# EAGLE board MotorControlRev4-PrototypeA (EAGLE 7.7.0)
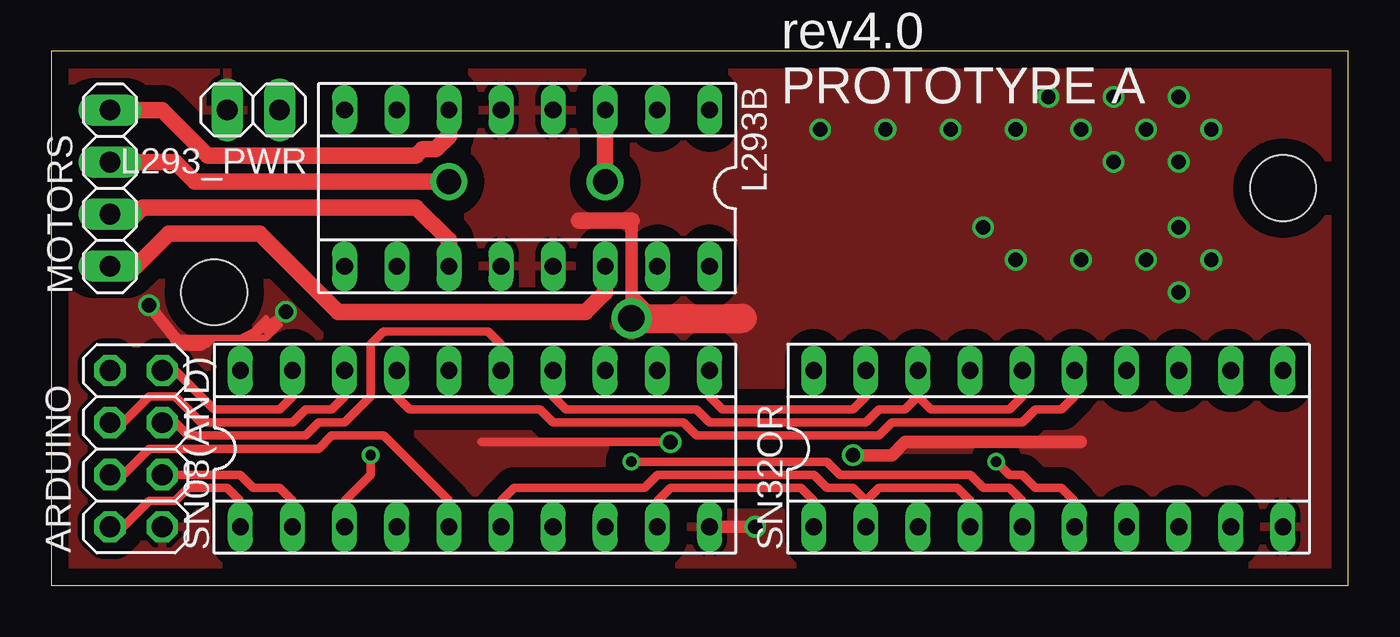
[diagram p0: board, top side]
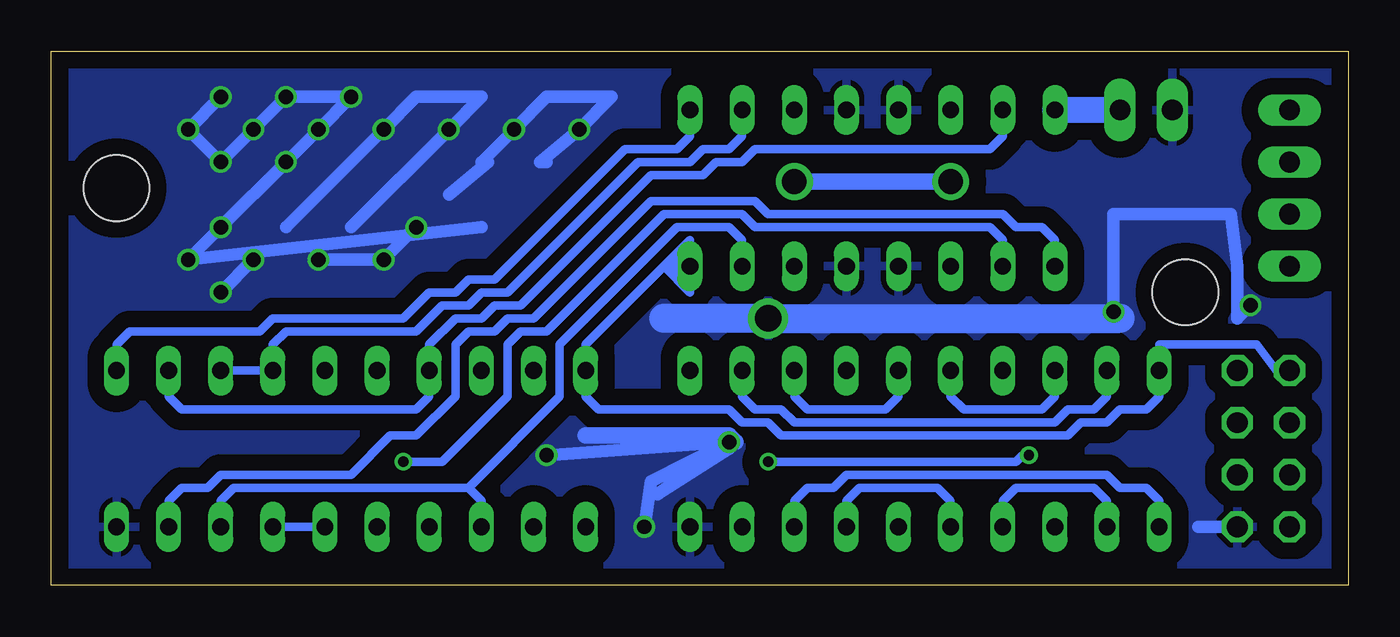
[diagram p1: board, bottom side, seen from below]

Size 63.18 x 26.04 mm. Coordinates in mm from the lower left corner, seen from the top.
Outline: 0,0 63.18,0 63.18,26.04 0,26.04 0,0
Copper layers (1*16): Top 0.0356mm / dielectric 1.5011mm / Bottom 0.0356mm
Design rules "oshpark-2layer": minimum track width 6mil, minimum drill 13mil, track to track 6mil, track to pad 6mil, pad to pad 6mil, via to via 6mil, smd to smd 6mil, copper to edge 15mil, drill to drill 6mil, minimum pad ring 7mil, minimum via ring 7mil, stop-mask expansion 2.5mil, vias tented up to drill 0mil, thermal gap 10mil
Holes 3.2 mm at 60.01,19.37 7.94,14.29

## Footprints (pad centres in the part's own frame; a part is rotated, then mirrored left to right if it is on the bottom)
2X04 = drill 1.016 octagon: 1 -3.81,-1.27; 2 -3.81,1.27; 3 -1.27,-1.27; 4 -1.27,1.27; 5 1.27,-1.27; 6 1.27,1.27; 7 3.81,-1.27; 8 3.81,1.27
1X02 = drill 1.016 long: 1 -1.27,0; 2 1.27,0
SOCKET-16 = drill 0.813 long: 1 -8.89,-3.81; 2 -6.35,-3.81; 3 -3.81,-3.81; 4 -1.27,-3.81; 5 1.27,-3.81; 6 3.81,-3.81; 7 6.35,-3.81; 8 8.89,-3.81; 9 8.89,3.81; 10 6.35,3.81; 11 3.81,3.81; 12 1.27,3.81; 13 -1.27,3.81; 14 -3.81,3.81; 15 -6.35,3.81; 16 -8.89,3.81
1X04 = drill 1.016 long: 1 -3.81,0; 2 -1.27,0; 3 1.27,0; 4 3.81,0
SOCKET-20 = drill 0.813 long: 1 -11.43,-3.81; 2 -8.89,-3.81; 3 -6.35,-3.81; 4 -3.81,-3.81; 5 -1.27,-3.81; 6 1.27,-3.81; 7 3.81,-3.81; 8 6.35,-3.81; 9 8.89,-3.81; 10 11.43,-3.81; 11 11.43,3.81; 12 8.89,3.81; 13 6.35,3.81; 14 3.81,3.81; 15 1.27,3.81; 16 -1.27,3.81; 17 -3.81,3.81; 18 -6.35,3.81; 19 -8.89,3.81; 20 -11.43,3.81

## Placement (x,y rotation side)
ARDUINO  [2X04]  4.13,6.67 90 top
L293_PWR  [1X02]  9.84,23.18 180 top
L293B  [SOCKET-16]  23.18,19.37 180 top
MOTORS  [1X04]  2.86,19.37 90 top
SN08(AND)  [SOCKET-20]  20.64,6.67 0 top
SN32OR  [SOCKET-20]  48.58,6.67 0 top

## Library data of the parts
ARDUINO L293_PWR MOTORS = pinhead
L293B SN08(AND) SN32OR = ic-package

## Nets
GND: ARDUINO.1 L293_PWR.2 L293B.4 L293B.5 L293B.12 L293B.13 SN08(AND).10 SN32OR.10
S$1: ARDUINO.7 SN08(AND).12 SN08(AND).19
S$2: SN08(AND).14 SN32OR.16 SN32OR.18
S$3: ARDUINO.6 SN08(AND).16 SN08(AND).18
S$4: SN08(AND).6 SN32OR.2 SN32OR.4
S$5: ARDUINO.5 SN08(AND).13 SN08(AND).15
S$6: SN08(AND).3 SN32OR.5
S$7: ARDUINO.3 SN08(AND).2 SN08(AND).4
S$8: SN08(AND).11 SN32OR.19
S$9: ARDUINO.4 SN08(AND).5 SN08(AND).7
S$10: SN08(AND).17 SN32OR.15
S$11: ARDUINO.2 SN08(AND).1 SN08(AND).8
S$12: L293B.10 SN32OR.6 SN32OR.7
S$13: ARDUINO.8 L293B.16 SN08(AND).20 SN32OR.20
S$14: L293B.2 SN32OR.13 SN32OR.14
S$15: L293B.9 SN32OR.9
S$16: L293B.15 SN32OR.3 SN32OR.8
S$17: SN08(AND).9 SN32OR.1
S$18: L293B.1 SN32OR.11
S$19: L293B.7 SN32OR.12 SN32OR.17
S$20: L293B.3 MOTORS.3
S$21: L293B.14 MOTORS.1
S$22: L293B.6 MOTORS.4
S$23: L293_PWR.1 L293B.8
S$25: L293B.11 MOTORS.2

## Tracks (layer width: path | path; a pad name or v marks a point on that pad's centre or on a via)
GND  (via drill 0.7, 1.3)
  Top 0.305: 10.48,12.38 v11.43,13.34 10.48,12.7 9.84,12.06 | 6.03,12.06 7.62,12.06 | 7.62,12.06 7.94,12.06 | 7.94,12.06 9.21,12.06 | 9.21,12.06 9.53,12.06 | 9.53,12.06 9.84,12.06 | 9.53,12.06 9.84,12.38 | 9.84,12.38 10.48,13.02 | 9.84,12.38 9.21,12.06 | 9.84,12.06 10.48,12.06 11.11,12.7 | 7.62,12.06 7.62,11.75 7.94,12.06
  Top 0.406: v30.16,6.99 20.95,6.99 | 28.26,17.78 28.26,14.29 | 28.26,14.29 v28.26,13.02 | 29.21,13.34 28.26,14.29
  Top 0.61: SN08(AND).10 v34.29,2.86 | 50.16,6.99 41.59,6.99 40.96,6.35 v39.05,6.35 | v4.76,13.65 6.03,12.06 6.35,11.75 7.3,11.75 | 28.26,17.78 v28.26,13.02
  Top 0.813: 25.72,17.78 28.26,17.78
  Top 1.422: v28.26,13.02 33.66,13.02
  Bottom 0.61: v34.29,2.86 33.97,5.08 v30.16,6.99 | v30.16,6.99 33.66,4.45 30.16,6.67 | v39.05,6.35 v30.16,6.99 | v54.93,14.29 v53.34,15.88 | 51.75,17.46 v46.99,22.23 45.4,23.81 42.23,23.81 v43.81,22.23 48.58,17.46 | v50.16,15.88 v46.99,15.88 v45.4,17.46 | 43.81,19.05 41.91,20.64 42.23,20.64 v40.64,22.23 39.05,23.81 35.88,23.81 v37.47,22.23 39.37,20.64 39.05,20.64 | 42.23,17.46 v56.52,15.88 v54.93,17.46 v51.75,20.64 v50.16,22.23 v48.58,23.81 v51.75,23.81 v53.34,22.23 v54.93,20.64 v56.52,22.23 v54.93,23.81 | 7.3,2.86 ARDUINO.1 | 11.43,13.02 v11.43,13.34 11.43,18.1 5.71,18.1 5.4,15.56 5.4,13.02 v4.76,13.65
  Bottom 0.813: 30.48,6.99 v30.16,6.99 29.84,6.99 30.16,7.3 37.15,7.3
  Bottom 1.422: 33.34,13.02 v28.26,13.02 11.43,13.02 11.11,13.02
  pour Top (isolate 0.813): 0.95,0.95 62.23,0.95 62.23,25.08 0.95,25.08
  pour Bottom (isolate 0.813): 0.95,0.95 62.23,0.95 62.23,25.08 0.95,25.08
S$1
  Top 0.406: SN08(AND).19 11.75,9.21 11.11,8.57 7.94,8.57 6.03,10.48 ARDUINO.7
  Bottom 0.406: SN08(AND).19 11.75,9.21 12.38,8.57 13.65,8.57 14.29,7.94 26.99,7.94 27.62,8.57 28.89,8.57 29.53,9.21 SN08(AND).12
S$2
  Top 0.406: SN32OR.18 42.23,9.21 | SN32OR.16 47.31,9.21 46.67,8.57 42.86,8.57 42.23,9.21 | SN08(AND).14 24.45,9.21 25.08,8.57 31.43,8.57 32.07,7.94 39.69,7.94 40.32,8.57 41.59,8.57 42.23,9.21
S$3
  Top 0.406: SN08(AND).18 14.29,9.21 13.65,8.57 12.38,8.57 11.75,7.94 7.3,7.94 6.03,9.21 4.76,9.21 3.49,7.94 ARDUINO.6
  Bottom 0.406: SN08(AND).16 19.37,9.21 18.73,8.57 14.92,8.57 14.29,9.21 SN08(AND).18
S$4
  Top 0.406: SN32OR.4 44.77,4.13 44.13,4.76 40.32,4.76 39.69,4.13 | SN08(AND).6 21.91,4.13 22.54,4.76 28.89,4.76 29.53,5.4 37.15,5.4 37.78,4.76 39.05,4.76 39.69,4.13 | SN32OR.2 39.69,4.13
S$5
  Top 0.406: SN08(AND).15 21.91,11.75 21.27,12.38 16.19,12.38 15.56,11.75 15.56,9.21 14.29,7.94 13.02,7.94 12.38,7.3 6.67,7.3 6.03,7.94 ARDUINO.5
  Bottom 0.406: SN08(AND).13 26.99,9.21 26.35,8.57 22.54,8.57 21.91,9.21 SN08(AND).15
S$6  (via drill 0.5)
  Top 0.406: SN32OR.5 47.31,4.13 46.67,4.76 45.4,4.76 44.77,5.4 38.42,5.4 37.78,6.03 v28.26,6.03 | SN08(AND).3 14.29,4.13 15.56,5.4 v15.56,6.35
  Bottom 0.406: v15.56,6.35 15.88,6.35 16.19,6.03 v28.26,6.03
S$7
  Top 0.406: SN08(AND).2 11.75,4.13 11.11,4.76 9.84,4.76 9.21,5.4 ARDUINO.3
  Bottom 0.406: SN08(AND).2 11.75,4.13 12.38,4.76 16.19,4.76 16.83,4.13 SN08(AND).4
S$8
  Top 0.406: SN08(AND).11 32.07,9.21 32.7,8.57 39.05,8.57 39.69,9.21 SN32OR.19
S$9
  Top 0.406: SN08(AND).5 19.37,4.13 16.19,7.3 13.65,7.3 13.02,6.67 4.76,6.67 3.49,5.4 ARDUINO.4
  Bottom 0.406: SN08(AND).5 19.37,4.13 20,4.76 23.81,4.76 24.45,4.13 SN08(AND).7
S$10
  Top 0.406: SN32OR.15 49.85,9.21 49.21,8.57 47.94,8.57 47.31,7.94 40.96,7.94 40.32,7.3 31.43,7.3 30.8,7.94 24.45,7.94 23.81,8.57 17.46,8.57 16.83,9.21 SN08(AND).17
S$11
  Top 0.406: SN08(AND).1 9.21,4.13 8.57,4.76 6.67,4.76 6.03,4.13 4.76,4.13 3.49,2.86 ARDUINO.2
  Bottom 0.406: SN08(AND).1 9.21,4.13 9.84,4.76 11.11,4.76 11.75,5.4 24.45,5.4 25.08,4.76 26.35,4.76 26.99,4.13 SN08(AND).8
S$12  (via drill 0.5)
  Top 0.406: SN32OR.6 49.85,4.13 49.21,4.76 47.94,4.76 47.31,5.4 46.67,5.4 v46.04,6.03
  Bottom 0.406: L293B.10 16.83,16.83 17.46,17.46 28.89,17.46 29.53,18.1 33.34,18.1 39.05,12.38 40.32,12.38 40.96,11.75 40.96,9.21 44.13,6.03 v46.04,6.03 | SN32OR.6 SN32OR.7
S$13
  Bottom 0.406: ARDUINO.8 3.49,10.48 4.45,11.75 9.21,11.75 SN08(AND).20 9.21,9.21 9.84,8.57 11.11,8.57 11.75,7.94 13.02,7.94 13.65,7.3 27.62,7.3 28.26,7.94 29.53,7.94 30.16,8.57 36.51,8.57 37.15,9.21 SN32OR.20 37.15,11.75 33.34,15.56 | L293B.16 32.07,16.83 32.7,16.19 | 32.7,16.19 33.34,15.56 | L293B.16 33.02,15.56 | 33.02,15.56 33.34,15.56 | L293B.16 32.7,16.19 | 33.02,15.56 32.38,16.19 | L293B.16 32.07,14.29 33.34,15.56 | 33.34,15.56 32.38,15.24 32.38,14.92
S$14
  Bottom 0.406: SN32OR.13 SN32OR.14 52.39,11.75 51.75,12.38 45.4,12.38 44.13,13.65 42.86,13.65 42.23,14.29 40.96,14.29 34.61,20.64 32.07,20.64 31.43,21.27 30.16,21.27 29.53,21.91 L293B.2
S$15
  Bottom 0.406: SN32OR.9 57.47,4.13 56.83,4.76 55.56,4.76 54.93,5.4 48.58,5.4 46.67,7.3 45.4,7.3 43.5,9.21 43.5,11.75 42.86,12.38 41.59,12.38 40.96,13.02 39.69,13.02 33.97,18.73 28.89,18.73 28.26,18.1 16.83,18.1 16.19,17.46 14.92,17.46 14.29,16.83 L293B.9
S$16
  Bottom 0.406: SN32OR.3 42.23,4.13 42.86,4.76 | 42.86,4.76 54.29,4.76 54.93,4.13 SN32OR.8 | 42.86,4.76 38.42,9.21 38.42,11.75 32.7,17.46 30.16,17.46 29.53,16.83 L293B.15
S$17
  Top 0.406: SN08(AND).9 29.53,4.13 30.16,4.76 36.51,4.76 37.15,4.13 SN32OR.1
S$18
  Bottom 0.406: SN32OR.11 60.01,11.75 59.37,12.38 53.02,12.38 52.39,13.02 46.04,13.02 44.77,14.29 43.5,14.29 42.86,14.92 41.59,14.92 35.24,21.27 32.7,21.27 32.07,21.91 L293B.1
S$19
  Bottom 0.406: SN32OR.12 57.47,9.21 56.83,8.57 45.4,8.57 44.77,9.21 SN32OR.17 44.77,11.75 43.5,13.02 42.23,13.02 41.59,13.65 40.32,13.65 33.97,20 31.43,20 30.8,20.64 29.53,20.64 28.89,21.27 17.46,21.27 16.83,21.91 L293B.7
S$20  (via drill 1.2)
  Top 0.813: v26.99,19.68 L293B.3 | v19.37,19.68 6.99,19.68 6.03,20.64 MOTORS.3
  Bottom 0.813: v26.99,19.68 v19.37,19.68
S$21
  Top 0.813: L293B.14 26.99,14.29 26.04,13.34 13.97,13.34 10.16,17.14 5.71,17.14 4.13,15.56 MOTORS.1
S$22
  Top 0.813: MOTORS.4 5.4,23.18 7.62,20.95 17.78,20.95 18.1,21.27 18.73,21.27 19.37,21.91 L293B.6
S$23
  Bottom 1.27: L293_PWR.1 L293B.8
S$25
  Top 0.813: L293B.11 19.37,16.83 17.78,18.41 4.45,18.41 4.13,18.1 MOTORS.2

## Text on the board
tNames: Pirover / Motor Control / Driver Circuit / rev4.0 / PROTOTYPE A
tValues: M2B | GND | M2A | L293 | M1B | M1A | ARDUINO | Pirover / Motor Control / Driver Circuit / rev4.0 / PROTOTYPE A | 5V | M2-PWM | M2-A | M2-B | M1-B | SN08(AND) | SN32(OR) | M1-A | M1-PWM | GND